# EAGLE board DRIVER MOTOR UP KRSBI (EAGLE 9.5.2)
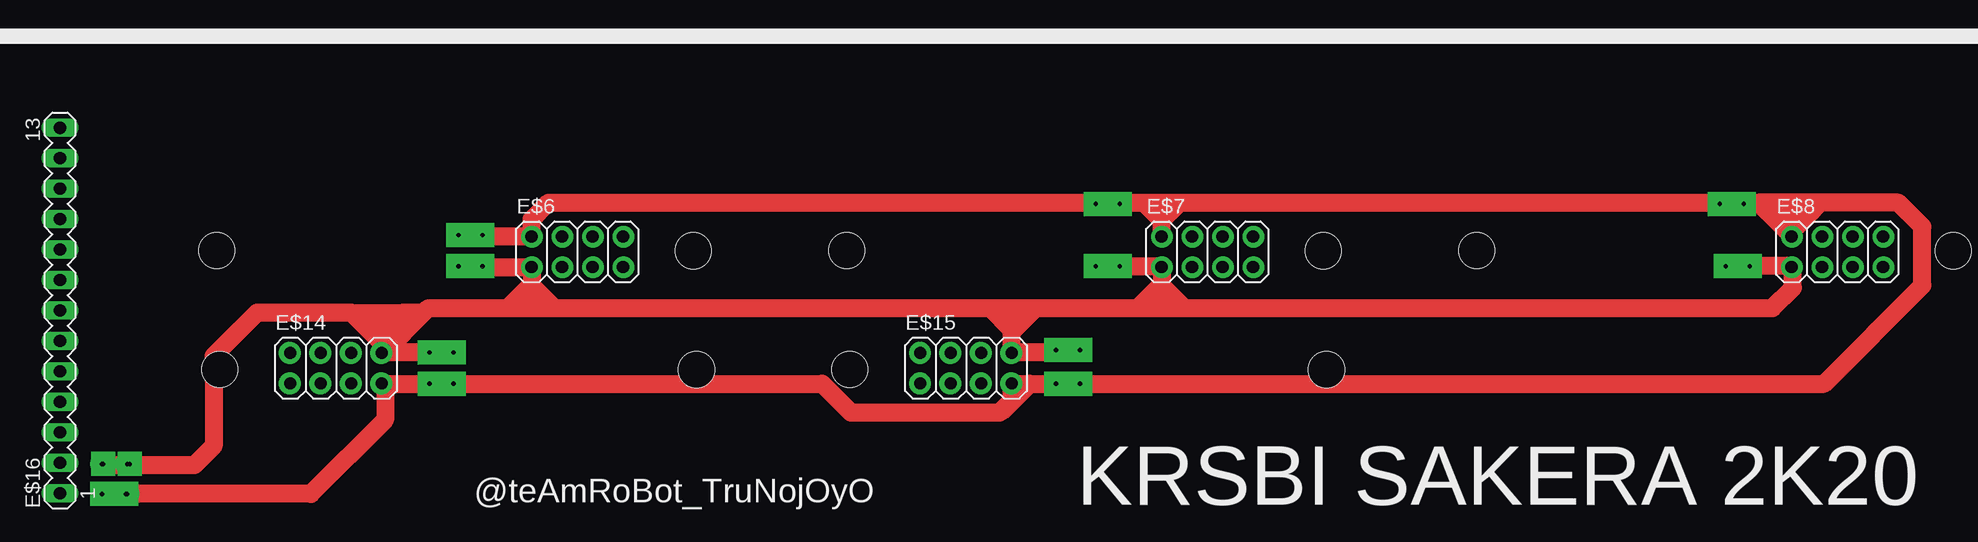
[diagram p0: board, top side]
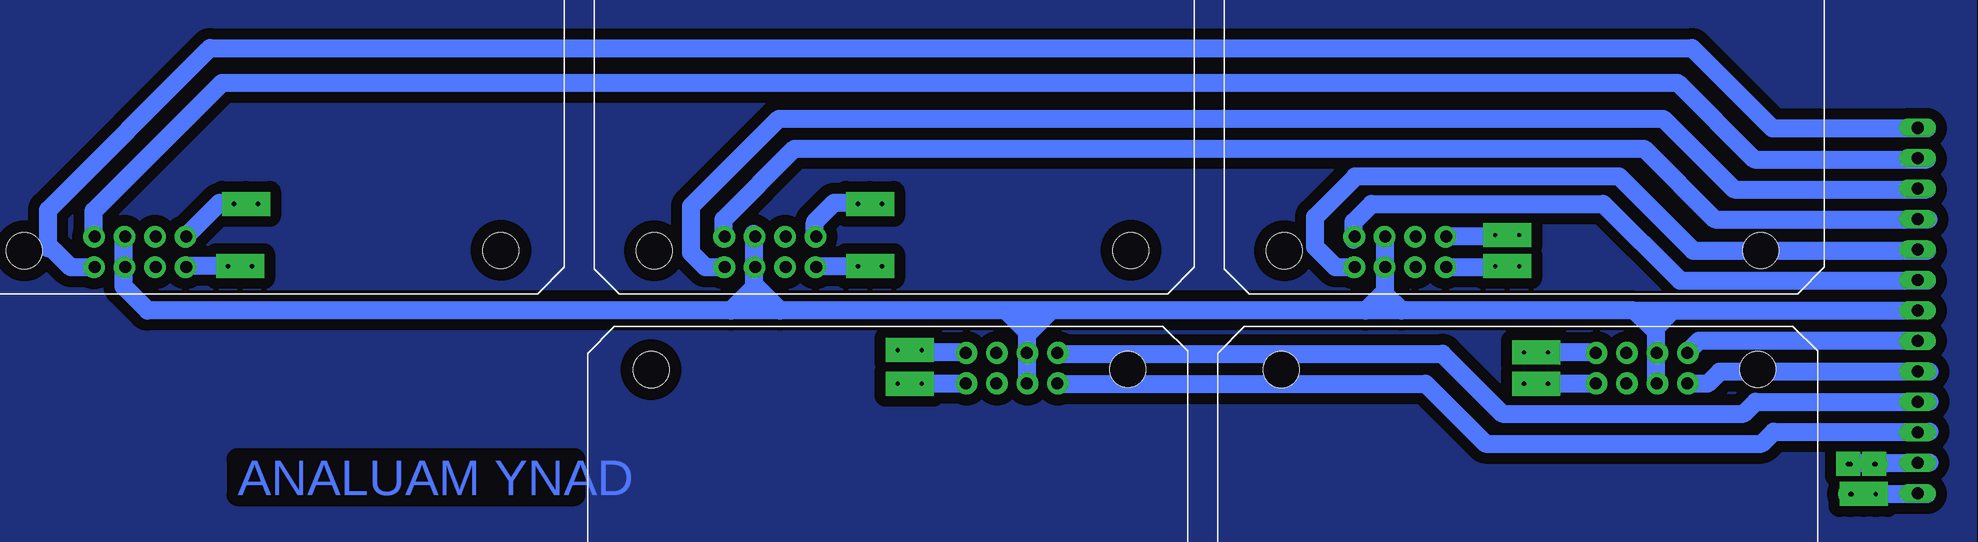
[diagram p1: board, bottom side, seen from below]

No outline drawn. Coordinates in mm, seen from the top.
Copper layers (1*16): Top 0.035mm / dielectric 1.5mm / Bottom 0.035mm
Design rules "default *": minimum track width 6mil, minimum drill 0.35mm, track to track 36mil, track to pad 36mil, pad to pad 6mil, via to via 6mil, smd to smd 6mil, copper to edge 40mil, drill to drill 6mil, minimum pad ring 10mil, minimum via ring 8mil, stop-mask expansion 4mil, vias tented up to drill 0mil, thermal gap 10mil

## Footprints (pad centres in the part's own frame; a part is rotated, then mirrored left to right if it is on the bottom)
DRIVER_BTS = drill 0.8 pad 1.8: GND 26.28,-41.42; L_EN 31.36,-41.42; L_IS 28.82,-41.42; LPWM 33.9,-41.42; R_EN 31.36,-38.88; R_IS 28.82,-38.88; RPWM 33.9,-38.88; VCC 26.28,-38.88 | hole 3: 0.01,-40.03; 39.73,-40.05; 0.01,-0.03; 39.73,-0.05
2X04 = drill 1.016 octagon: 1 -3.81,-1.27; 2 -3.81,1.27; 3 -1.27,-1.27; 4 -1.27,1.27; 5 1.27,-1.27; 6 1.27,1.27; 7 3.81,-1.27; 8 3.81,1.27
MA13-1 = drill 1.016 long: 1 -15.24,0; 2 -12.7,0; 3 -10.16,0; 4 -7.62,0; 5 -5.08,0; 6 -2.54,0; 7 0,0; 8 2.54,0; 9 5.08,0; 10 7.62,0; 11 10.16,0; 12 12.7,0; 13 15.24,0

## Placement (x,y rotation side)
E$1  [DRIVER_BTS]  133.55,103.64 0 top
E$2  [DRIVER_BTS]  121.05,13.64 180 top
E$3  [DRIVER_BTS]  81.05,103.64 0 top
E$4  [DRIVER_BTS]  28.55,103.64 0 top
E$5  [DRIVER_BTS]  68.55,13.64 180 top
E$6  [2X04]  58.6,63.5 0 top
E$7  [2X04]  111.1,63.5 0 top
E$8  [2X04]  163.6,63.5 0 top
E$14  [2X04]  38.5,53.8 0 top
E$15  [2X04]  91,53.8 0 top
E$16  [MA13-1]  15.5,58.6 90 top

## Library data of the parts
E$1-E$5 = KRI COMPONENT
E$6-E$8 E$14 E$15 = pinhead
E$16 = con-lstb

## Tracks (layer width: path | path; a pad name or v marks a point on that pad's centre or on a via)
BB
  pour Bottom: 175.4,84.7 175.4,36.7 10.6,36.7 10.6,84.7
S$1
  Bottom 1.5: 34.7,55.1 33.7,56.1 14.7,56.1
S$2
  Bottom 1.5: 112.5,65 112.5,58.8 112.6,58.7
S$3
  Bottom 1.5: 37.3,52.4 37.3,56.8 39.1,58.6 | 59.9,64.9 59.9,60.2 61.5,58.6 | 61.5,58.6 87.7,58.6 | 87.7,58.6 89.7,58.6 | 89.7,58.6 91.5,58.6 | 91.5,58.6 110.3,58.6 | 110.3,58.6 114.4,58.6 | 114.4,58.6 163,58.6 165,60.6 165,64.8 | 89.7,52.4 89.7,56.6 | 89.7,56.6 89.7,58.6 | 39.1,58.6 58.5,58.6 | 58.5,58.6 61.5,58.6 | 58.5,58.6 59.9,60 | 89.8,56.9 91.5,58.6 | 89.7,56.6 87.7,58.6 | 110.3,58.6 112.3,60.6 | 112.4,60.6 114.4,58.6 | 39.1,58.6 35.9,58.6 | 14.7,58.6 34.7,58.6 35.9,58.6 | 37.3,57.2 35.9,58.6
S$4
  Bottom 1.5: 14.5,53.5 32,53.5 33,52.5 34.5,52.5
S$5
  Bottom 1.5: 87,55 55.1,55 50.1,50 30,50 29,51 14.5,51
S$6
  Bottom 1.5: 87,52.5 56.5,52.5 51.5,47.5 28.5,47.5 27.5,48.5 14.5,48.5
S$7
  Bottom 1.5: 62.5,64.5 62.5,66 61,67.5 41.7,67.5 35.3,61.1 14.7,61.1
S$8
  Bottom 1.5: 62.3,62.2 64,62.2 65.7,63.9 65.7,66.4 62.4,69.7
S$9
  Bottom 1.5: 62.4,69.8 40.4,69.8 34.2,63.6 14.7,63.6
S$10
  Bottom 1.5: 115,64.6 115,66.2 109.1,72.1 38.3,72.1 32.4,66.2 14.6,66.2
S$11
  Bottom 1.5: 114.8,62.2 116.5,62.2 117.7,63.4 117.7,67.3 110.4,74.6 36.7,74.6 30.8,68.7 14.7,68.7
S$12
  Bottom 1.5: 167.4,62.2 169.4,62.2 171.2,64
S$13
  Bottom 1.5: 167.5,64.7 167.5,66.9 156.8,77.6 47,77.6
S$14
  Bottom 1.5: 46.9,77.6 35.5,77.6 29.1,71.2 14.7,71.2
S$15
  Bottom 1.5: 171.3,63.8 171.3,67 158,80.3
S$16
  Bottom 1.5: 157.8,80.5 34.3,80.5 27.6,73.8 14.7,73.8
S$17  (via drill 0.35 pad 2)
  other vias: 19,45.8
S$18  (via drill 0.35 pad 2)
  Top 1.5: 107.3,58.9 107.3,62.3 v103.8,62.3
  Bottom 1.5: 107.3,62.3 v103.8,62.3
S$20  (via drill 0.35 pad 2)
  other vias: 21.1,45.8
S$22
  Bottom 1.5: 21.1,45.6 20.8,45.9 14.5,45.9
S$23  (via drill 0.35 pad 2)
  Top 1.5: 42.6,52.4 42.6,49.5 36.4,43.3 v21.1,43.3 v21,43.3 v19,43.3 18.9,43.3
  Bottom 1.5: 21.2,43.3 v21,43.3 v19,43.3 14.7,43.3
S$25  (via drill 0.35 pad 2)  (1 unrouted)
  Top 1.5: 107.3,64.7 107.3,66.1 | 107.3,66.1 107.3,67.4 | 42.3,52.5 v46.3,52.5 v48.3,52.5 79,52.5 81.4,50.1 93.8,50.1 94.8,51.1 94.8,52.5 96.3,52.5 | 96.3,52.5 v98.5,52.5 v100.5,52.5 162.5,52.5 170.7,60.7 170.7,65.6 168.7,67.6 162.2,67.6 | 54.8,64.6 54.8,64.8 | 54.8,64.8 54.8,66.2 56.2,67.6 105.8,67.6 | 105.8,67.6 108.8,67.6 | 108.8,67.6 157,67.6 | 157,67.6 159.8,64.8 | 162.2,67.6 157,67.6 | 159.8,64.9 159.8,65.2 161.1,66.5 | 162.2,67.6 161.1,66.5 | 161.1,66.5 159.3,66.5 | 94,50.2 96.3,52.5 | 107.3,66.1 108.8,67.6 | 107.3,66.1 105.8,67.6 | 50.6,64.8 54.8,64.8
  Bottom 1.5: 54.8,64.8 50.6,64.8
S$26
  Bottom 1.5: 107.4,64.8 107.4,66 105.8,67.6 103.8,67.6
S$28  (via drill 0.35 pad 2)
  Top 1.5: 159.8,62.3 v156.3,62.3 155.5,62.3
  Bottom 1.5: 155.5,62.3 v156.3,62.3 159.6,62.3 159.7,62.2
S$29
  Bottom 1.5: 159.9,64.7 157,67.6 155.8,67.6
S$30  (2 unrouted)
  Top 1.5: 94.8,56.8 94.8,55.1 98.2,55.1 | 94.8,56.8 94.8,57 | 94.8,57 94.8,58.7 | 52.8,58.8 46.2,58.8 42.3,54.9 42.3,55.9 39.8,58.4 | 52.8,58.8 54.8,58.8 | 54.8,58.8 56.7,58.8 | 56.7,58.8 93,58.8 | 93,58.8 96.8,58.8 | 96.8,58.8 105.3,58.8 | 105.3,58.8 109.2,58.8 | 109.2,58.8 158.2,58.8 159.9,60.5 159.9,62.3 | 54.8,62.3 54.8,62.2 | 54.8,62.2 54.8,60.7 | 54.8,60.7 54.8,58.8 | 94.8,56.8 96.8,58.8 | 94.8,57 93,58.8 | 54.8,60.7 56.7,58.8 | 54.6,60.6 52.8,58.8 | 107.2,60.7 105.3,58.8 | 107.4,60.6 109.2,58.8 | 39.8,58.4 31.9,58.4 28.3,54.8 28.3,47.3 26.7,45.7 19,45.7 | 39.8,58.4 44.1,58.4 | 45.7,58.4 44.1,58.4 | 44.1,58.4 42.6,56.9 42.3,56.9 41.8,57.4 | 54.8,62.2 50.7,62.2
  Bottom 1.5: 94.8,55.1 98.2,55.1 | 50.7,62.2 54.8,62.2
S$31
  Bottom 1.5: 94.7,52.5 98.3,52.5
S$32
  Bottom 1.5: 42.3,52.5 45.8,52.5
S$33  (1 unrouted)
  Top 1.5: 45.9,55.1 42.2,55.1
  Bottom 1.5: 42.3,55.1 45.9,55.1
S$34  (via drill 0.35 pad 2)
  other vias: 50.7,64.9
S$35  (via drill 0.35 pad 2)
  other vias: 48.7,64.9
S$36  (via drill 0.35 pad 2)
  other vias: 50.7,62.3
S$37  (via drill 0.35 pad 2)
  other vias: 48.7,62.3
S$38  (via drill 0.35 pad 2)
  other vias: 46.3,55.1
S$39  (via drill 0.35 pad 2)
  other vias: 48.3,55.1
S$40  (via drill 0.35 pad 2)
  other vias: 98.5,55.3
S$41  (via drill 0.35 pad 2)
  other vias: 100.5,55.3
S$42  (via drill 0.35 pad 2)
  other vias: 101.8,62.3
S$43  (via drill 0.35 pad 2)
  other vias: 103.8,67.5
S$44  (via drill 0.35 pad 2)
  other vias: 101.8,67.5
S$45  (via drill 0.35 pad 2)
  other vias: 154.3,62.3
S$46  (via drill 0.35 pad 2)
  other vias: 155.8,67.5
S$47  (via drill 0.35 pad 2)
  other vias: 153.8,67.5
S$48  (via drill 0.35 pad 2)
  other vias: 19.1,45.8
S$49  (via drill 0.35 pad 2)
  other vias: 21.3,45.8

## Text on the board
Bottom: ANALUAM YNAD
tPlace: @teAmRoBot_TruNojOyO | KRSBI SAKERA 2K20